# EAGLE board FTD232rl_breakout (EAGLE 7.1.0)
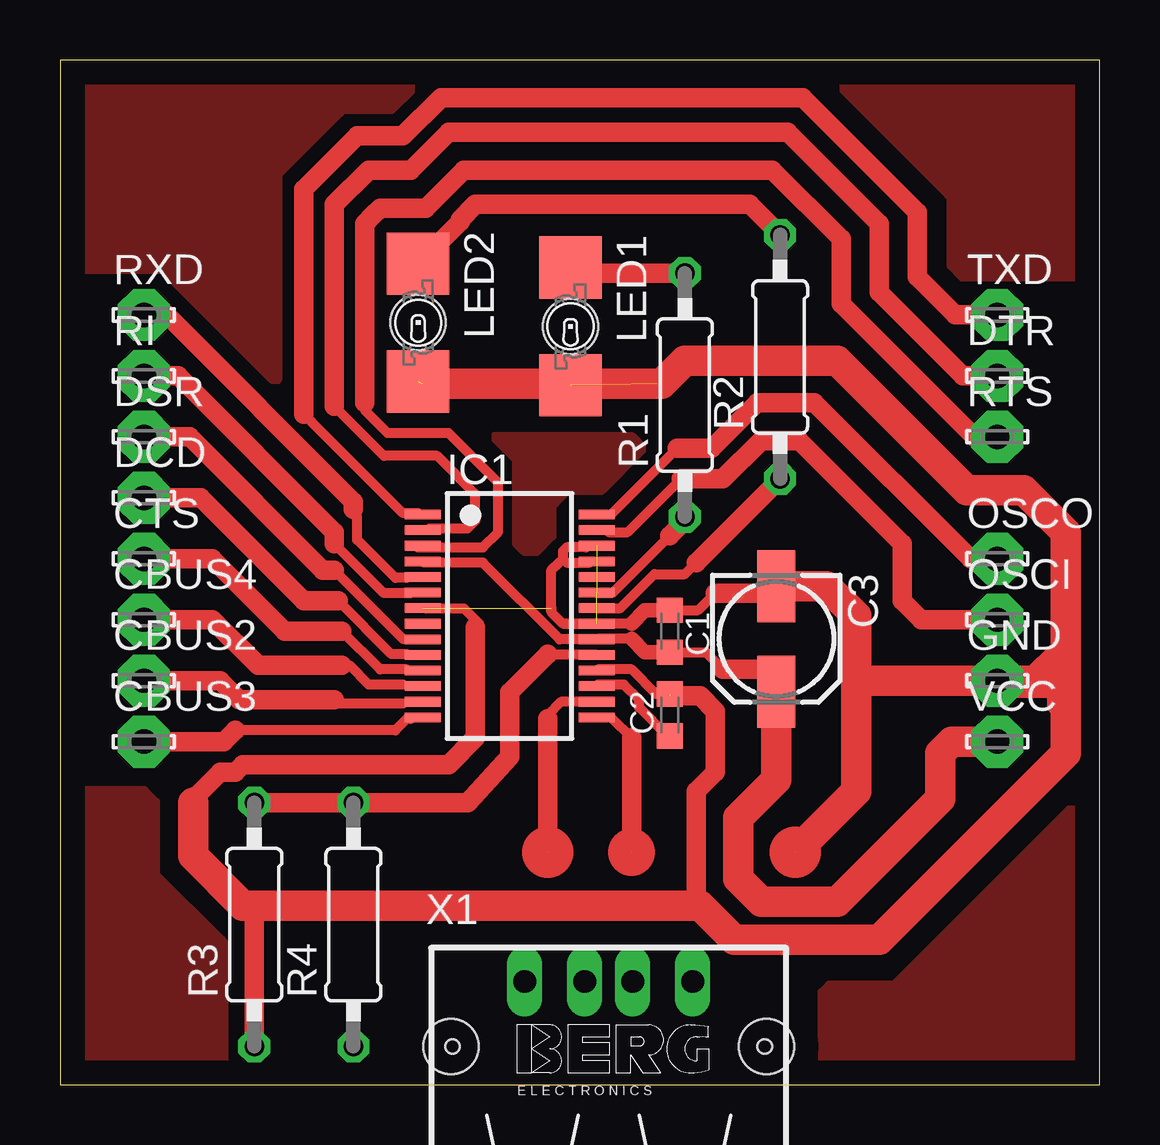
[diagram p0: board, top side]
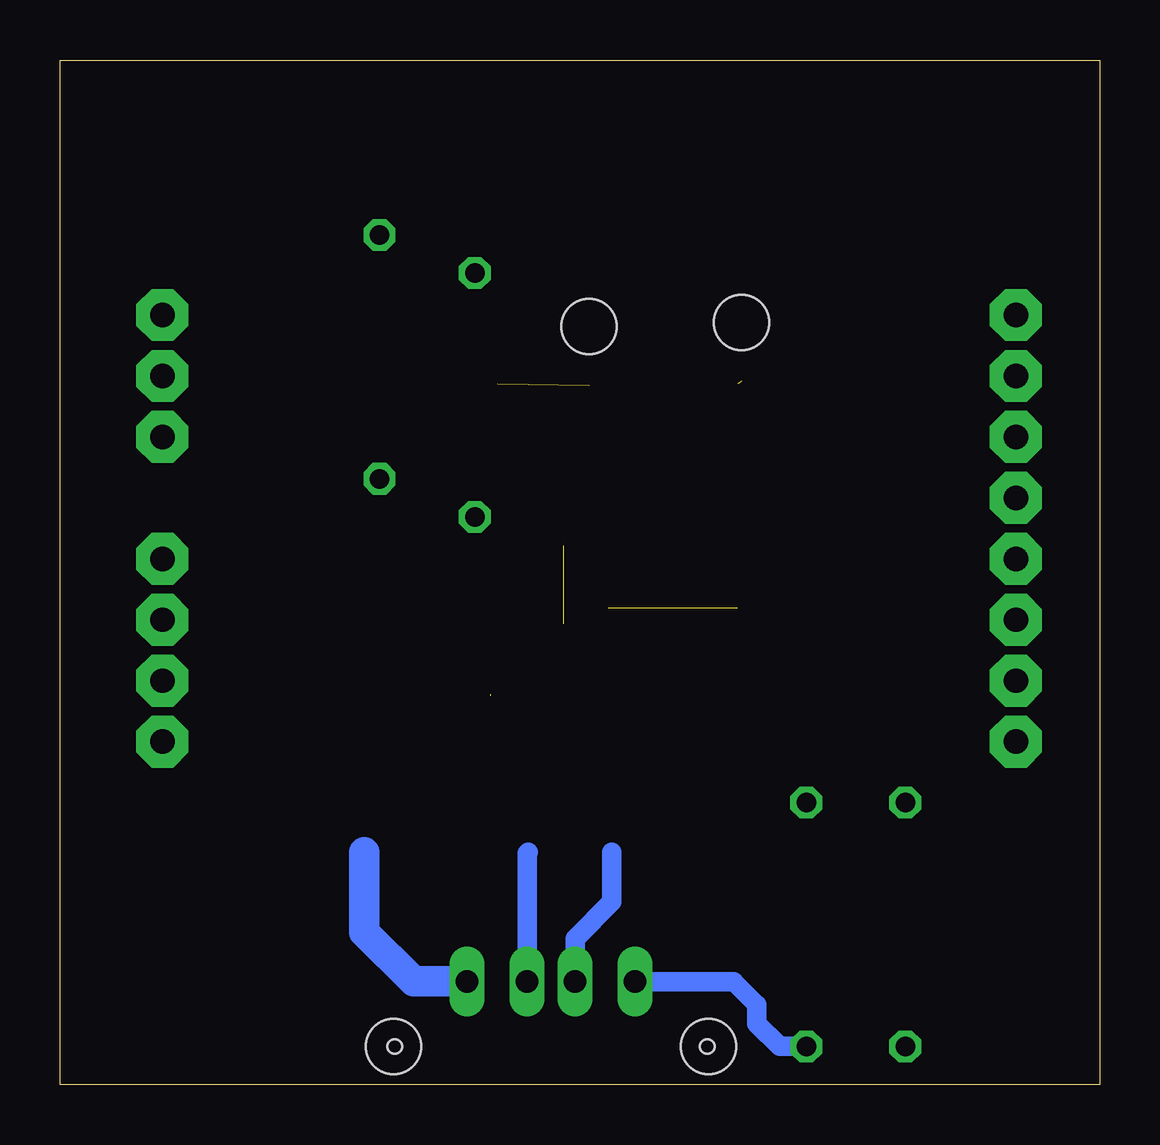
[diagram p1: board, bottom side, seen from below]

Size 43.32 x 42.69 mm. Coordinates in mm from the lower left corner, seen from the top.
Outline: 0,0 43.32,0 43.32,42.69 0,42.69 0,0
Copper layers (1*16): Top 0.035mm / dielectric 1.5mm / Bottom 0.035mm
Design rules "default": minimum track width 10mil, minimum drill 24mil, track to track 8mil, track to pad 8mil, pad to pad 8mil, via to via 8mil, smd to smd 8mil, copper to edge 40mil, drill to drill 8mil, minimum pad ring 10mil, minimum via ring 8mil, stop-mask expansion 4mil, vias tented up to drill 0mil, thermal gap 10mil
Holes 0.6 mm at 16.35,1.59 29.37,1.59

## Footprints (pad centres in the part's own frame; a part is rotated, then mirrored left to right if it is on the bottom)
C0603K = smd 1.05 x 1.08: 1 -0.875,0; 2 0.875,0
153CLV-0505 = smd 3 x 1.6: + 2.2,0; - -2.2,0
LSP10 = drill 1.016 pad 2.159 octagon: MP 0,0
SSOP28 = smd 0.4 x 1.5: 1 -4.225,-3.625; 2 -3.575,-3.625; 3 -2.925,-3.625; 4 -2.275,-3.625; 5 -1.625,-3.625; 6 -0.975,-3.625; 7 -0.325,-3.625; 8 0.325,-3.625; 9 0.975,-3.625; 10 1.625,-3.625; 11 2.275,-3.625; 12 2.925,-3.625; 13 3.575,-3.625; 14 4.225,-3.625; 15 4.225,3.625; 16 3.575,3.625; 17 2.925,3.625; 18 2.275,3.625; 19 1.625,3.625; 20 0.975,3.625; 21 0.325,3.625; 22 -0.325,3.625; 23 -0.975,3.625; 24 -1.625,3.625; 25 -2.275,3.625; 26 -2.925,3.625; 27 -3.575,3.625; 28 -4.225,3.625
P47F-TOP = smd 2.6 x 2.6: A -2.45,0; C 2.45,0 | hole 2.3: 0,0
0207/10 = drill 0.813 octagon: 1 -5.08,0; 2 5.08,0
PN87520 = drill 0.95 long: 1 -3.5,2.71; 2 -1,2.71; 3 1,2.71; 4 3.5,2.71 | hole 2.3: -6.57,0; 6.57,0

## Placement (x,y rotation side)
C1  100n  [C0603K]  25.4,18.89 270 top
C2  100n  [C0603K]  25.4,15.4 90 top
C3  [153CLV-0505]  29.85,18.57 270 top
CBUS2  LSP10  [LSP10]  3.49,16.83 0 top
CBUS3  LSP10  [LSP10]  3.49,14.29 0 top
CBUS4  LSP10  [LSP10]  3.49,19.37 0 top
CTS  LSP10  [LSP10]  3.49,21.91 0 top
DCD  LSP10  [LSP10]  3.49,24.45 0 top
DSR  LSP10  [LSP10]  3.49,26.99 0 top
DTR  LSP10  [LSP10]  39.05,29.53 0 top
GND  LSP10  [LSP10]  39.05,16.83 0 top
IC1  FT232RL  [SSOP28]  18.73,19.53 270 top
LED1  LRP4-TOP  [P47F-TOP]  21.27,31.59 270 top
LED2  LRP4-TOP  [P47F-TOP]  14.92,31.75 270 top
OSCI  LSP10  [LSP10]  39.05,19.37 0 top
OSCO  LSP10  [LSP10]  39.05,21.91 0 top
R1  270  [0207/10]  26.04,28.73 90 top
R2  270  [0207/10]  30,30.32 90 top
R3  10k  [0207/10]  8.1,6.67 90 top
R4  4k7  [0207/10]  12.22,6.67 90 top
RI  LSP10  [LSP10]  3.49,29.53 0 top
RTS  LSP10  [LSP10]  39.05,26.99 0 top
RXD  LSP10  [LSP10]  3.49,32.07 0 top
TXD  LSP10  [LSP10]  39.05,32.07 0 top
VCC  LSP10  [LSP10]  39.05,14.29 0 top
X1  [PN87520]  22.86,1.59 0 top

## Library data of the parts
C1 C2 = resistor; SPICEPREFIX: C
C3 = resistor
CBUS2-CBUS4 CTS DCD DSR DTR GND OSCI OSCO RI RTS RXD TXD VCC = solpad
IC1 = ftdichip; MPN: FT232RL; OC_FARNELL: 1146032; OC_NEWARK: 91K9918
LED1 LED2 = led
R1 R3 R4 = resistor; SPICEPREFIX: 270
R2 = resistor; SPICEPREFIX: R
X1 = con-berg; OC_FARNELL: unknown; OC_NEWARK: unknown

## Nets
GND: C1.1 C2.2 C3.- GND.MP IC1.7 IC1.18 IC1.21 IC1.25 IC1.26 LED1.C LED2.C X1.4
N$1: IC1.23 R1.1
N$2: IC1.22 R2.1
N$3: LED2.A R2.2
N$4: LED1.A R1.2
N$5: IC1.15 X1.3
N$6: IC1.16 X1.2
N$7: IC1.19 R3.2 R4.2
N$8: R4.1
N$9: IC1.5
N$10: C1.2 C3.+ IC1.4 IC1.20 VCC.MP
N$11: C2.1 IC1.17
N$12: IC1.3
N$13: IC1.1
N$14: IC1.11
N$15: IC1.2
N$16: IC1.9
N$17: IC1.10
N$18: IC1.6
N$19: IC1.27
N$20: IC1.13
N$21: IC1.14
N$23: IC1.28
S$1: OSCI.MP
S$3: OSCO.MP
S$7: CBUS3.MP
S$8: CBUS2.MP
S$9: CBUS4.MP
S$10: CTS.MP
S$11: DCD.MP
S$12: DSR.MP
S$13: RI.MP
S$15: RXD.MP
S$17: RTS.MP
S$18: DTR.MP
S$20: TXD.MP

## Tracks (layer width: path | path; a pad name or v marks a point on that pad's centre or on a via)
GND  (7 unrouted)
  Top 0.406: 23.81,19.21 IC1.21 22.35,19.21 20.96,19.21 20.48,19.69 20.48,19.84 20.47,19.85 | C1.1 26.59,19.77 27.3,20.48 | C2.2 24.84,16.27 23.81,17.3 22.41,17.3 IC1.18
  Top 0.61: C1.1 24.37,19.77 23.81,19.21
  Top 0.813: 27.3,20.48 29.55,20.48 C3.- | 11.91,7.46 26.51,7.46 26.51,12.22 27.3,13.02 27.3,15.56 26.67,16.19 25.4,16.19 | 26.67,7.46 26.99,7.46 28.58,5.87 33.97,5.87 34.13,6.03 41.75,13.65 41.75,15.88 41.75,16.51 | 41.75,16.51 41.75,17.62 41.59,17.78 41.59,16.67 41.75,16.51 | 41.75,16.51 39.37,16.51 GND.MP | 8.1,1.75 8.1,7.46
  Top 1.27: C3.- 31.93,20.77 33.18,19.53 33.18,16.67 | 33.18,16.67 33.18,12.22 30.64,9.68 | GND.MP 33.34,16.83 33.18,16.67 | 39.37,16.83 40.64,16.83 41.75,17.94 | 41.91,18.1 41.91,23.02 40.16,24.77 37.78,24.77 32.38,30.16 26.03,30.16 25.08,29.21 15.08,29.21 | 41.75,15.88 41.75,17.94 | 41.75,17.94 41.91,18.1 | 41.91,18.1 41.91,13.81 34.13,6.03 28.1,6.03 26.67,7.46 26.51,7.46 8.1,7.46 7.62,7.46 5.56,9.53 5.56,11.75
  Bottom 1.27: X1.4 28.59,4.3 30.64,6.35 30.64,9.68
N$1
  Top 0.406: IC1.23 23.04,20.5 25.4,22.86
  Top 0.813: 25.4,22.86 26.03,23.5 R1.1
N$2
  Top 0.406: IC1.22 23.34,19.85 24.76,21.27 26.03,21.27 26.51,21.75
  Top 0.813: R2.1 26.51,21.75
N$3
  Top 0.813: R2.2 28.73,36.67 17.3,36.67 16.67,36.04 16.67,35.95 LED2.A
N$4
  Top 0.813: R1.2 21.5,33.81 LED1.A
N$5  (1 unrouted)
  Top 0.406: IC1.15 22.96,15.3 23.81,14.45
  Top 0.813: 23.81,14.45 23.81,9.68
  Bottom 0.813: X1.3 23.86,9.64 23.81,9.68
N$6  (1 unrouted)
  Top 0.406: IC1.16 20.87,15.95 20.32,15.4 20.32,15.24 20.32,13.81
  Top 0.813: 20.32,9.68 20.32,13.18 20.32,13.49 20.32,15.24
  Bottom 0.813: X1.2 21.86,6.08 20.32,7.62 20.32,9.68
N$7
  Top 0.406: IC1.19 20.36,17.9 20.32,17.94
  Top 0.813: R3.2 R4.2 16.99,11.75 18.73,13.65 18.73,16.35 20.32,17.94
N$10
  Top 0.406: 23.81,18.57 22.38,18.57 IC1.20 20.82,18.55 17.62,21.75 15.16,21.75 IC1.4 | C1.2 26.91,18.02 27.62,17.3
  Top 0.61: C1.2 24.37,18.02 23.81,18.57
  Top 0.813: 27.62,17.3 29.53,17.3 29.53,16.69 C3.+
  Top 1.27: VCC.MP 37.15,14.29 36.67,13.81 36.67,11.91 32.38,7.62 29.21,7.62 28.26,8.57 28.26,11.11 29.85,12.7 C3.+
N$11
  Top 0.406: C2.1 25.32,14.52 24.13,15.72 24.13,16.03 23.49,16.67 22.42,16.67 IC1.17
S$1
  Top 0.406: 22.86,23.02 23.65,23.02 25.88,25.24
  Top 0.813: 25.88,25.24 27.62,25.24 29.21,26.83 30.8,26.83 35.08,22.54 35.08,20.16 35.88,19.37 OSCI.MP 39.21,19.53
S$2
  Top 0.406: 23.02,23.81 25.56,26.35
S$3
  Top 0.813: 25.72,26.51 27.15,26.51 29.05,28.42 31.43,28.42 37.94,21.91 OSCO.MP
S$4
  Top 0.406: 21.91,22.38 21.11,22.38 20.96,22.23 20.96,21.91 21.11,21.75 22.07,21.75
S$5
  Top 0.406: 21.75,19.21 20.96,19.21 20.48,19.69 20.48,21.43 20.8,21.75
S$6
  Top 0.813: 5.72,11.91 5.72,12.07 6.67,13.02 6.83,13.02 7.14,13.02
S$7
  Top 0.406: 14.6,15.24 14.45,15.24 13.97,14.76 7.46,14.76 6.98,14.29 CBUS3.MP
  Top 0.813: CBUS3.MP 6.83,14.29 7.3,14.76
S$8
  Top 0.406: 14.29,15.88 7.46,15.88 6.51,16.83
  Top 0.813: CBUS2.MP 6.51,16.83 6.67,16.83 7.46,16.03 11.43,16.03
S$9
  Top 0.406: 14.29,16.67 12.86,16.67 12.06,17.46 11.75,17.46 | 6.35,19.37 CBUS4.MP
  Top 0.813: 3.33,19.37 6.35,19.37 8.25,17.46 11.75,17.46
S$10
  Top 0.406: 14.45,17.3 13.33,17.3 11.75,18.89
  Top 0.813: 11.75,18.89 9.37,18.89 6.35,21.91 CTS.MP
S$11
  Top 0.406: 14.45,17.94 13.81,17.94 11.59,20.16
  Top 0.813: 11.59,20.16 10.16,20.16 5.87,24.45 DCD.MP
S$12
  Top 0.406: 14.29,18.57 11.43,21.43
  Top 0.813: 11.43,21.43 10.95,21.43 5.4,26.99 DSR.MP
S$13
  Top 0.406: 14.6,20.48 13.49,20.48 11.43,22.54
  Top 0.813: 11.43,22.54 11.43,23.02 4.92,29.53 RI.MP
S$14
  Top 0.406: 14.45,21.11 13.97,21.11 12.38,22.7 12.38,23.65 12.22,23.81
S$15
  Top 0.813: 12.22,23.97 12.22,24.29 4.44,32.07 RXD.MP
S$16
  Top 0.406: 14.92,22.38 17.62,22.38 18.26,23.02 18.26,25.08 16.19,27.15 13.65,27.15 12.7,28.1 12.7,28.42
  Top 0.813: 16.83,38.1 15.24,36.51 13.33,36.51 13.02,36.2 12.7,35.88 12.7,28.42
S$17
  Top 0.813: 16.99,38.1 29.69,38.1 32.54,35.24 32.54,32.54 38.1,26.99 RTS.MP
S$18
  Top 0.406: 15.4,23.18 16.99,23.18 17.3,23.5 17.3,24.61 15.72,26.19 13.49,26.19 11.43,28.26
  Top 0.813: 11.43,28.26 11.43,36.67 12.86,38.1 14.6,38.1 16.19,39.69 30.32,39.69 34.13,35.88 34.13,33.02 37.62,29.53 DTR.MP
S$19
  Top 0.406: 14.92,23.81 14.29,23.81 10.48,27.62
S$20
  Top 0.813: 10.16,27.94 10.16,37.31 12.38,39.53 14.29,39.53 15.87,41.12 30.96,41.12 35.72,36.35 35.72,33.66 37.31,32.07 TXD.MP
S$21
  Top 0.813: 7.3,13.02 7.62,13.34 16.19,13.34 17.3,14.45 17.3,19.05
S$22
  Top 0.406: 15.24,19.84 16.83,19.84 17.46,19.21
S$23
  Bottom 0.813: 19.21,4.29 15.24,4.29 14.29,3.33 14.29,2.54 13.33,1.59 12.38,1.59
S$24
  pour Top: 0.16,42.55 14.29,42.55 14.6,42.23 14.6,41.59 14.6,41.43 13.81,40.64 11.75,40.64 11.59,40.48 9.05,37.94 9.05,29.37 8.89,29.37 5.87,32.39 4.29,33.97 0.16,33.97
S$26
  pour Top: 31.91,42.55 43.18,42.55 43.18,33.66 37.62,33.66 37.15,34.13 37.15,36.99 36.99,37.15 31.91,42.23
S$27
  pour Top: 43.18,0.16 43.18,12.54 34.77,4.13 32.07,4.13 31.75,3.81 31.75,0.16 43.02,0.16
S$28
  pour Top: 0,12.22 0,0 6.83,0 6.83,5.87 6.67,6.03 3.97,8.73 3.97,11.75 3.81,11.91 3.49,12.22
S$29
  pour Top: 18.1,26.99 23.81,26.99 24.29,26.51 22.54,24.76 21.11,24.76 20.64,24.29 20.48,24.13 20.48,22.86 19.84,22.22 19.37,22.22 19.05,22.54 19.05,26.04
(copper drawn outside any net)
  shapes: Top circle x3